# EAGLE board attiny85 (EAGLE 7.5.0)
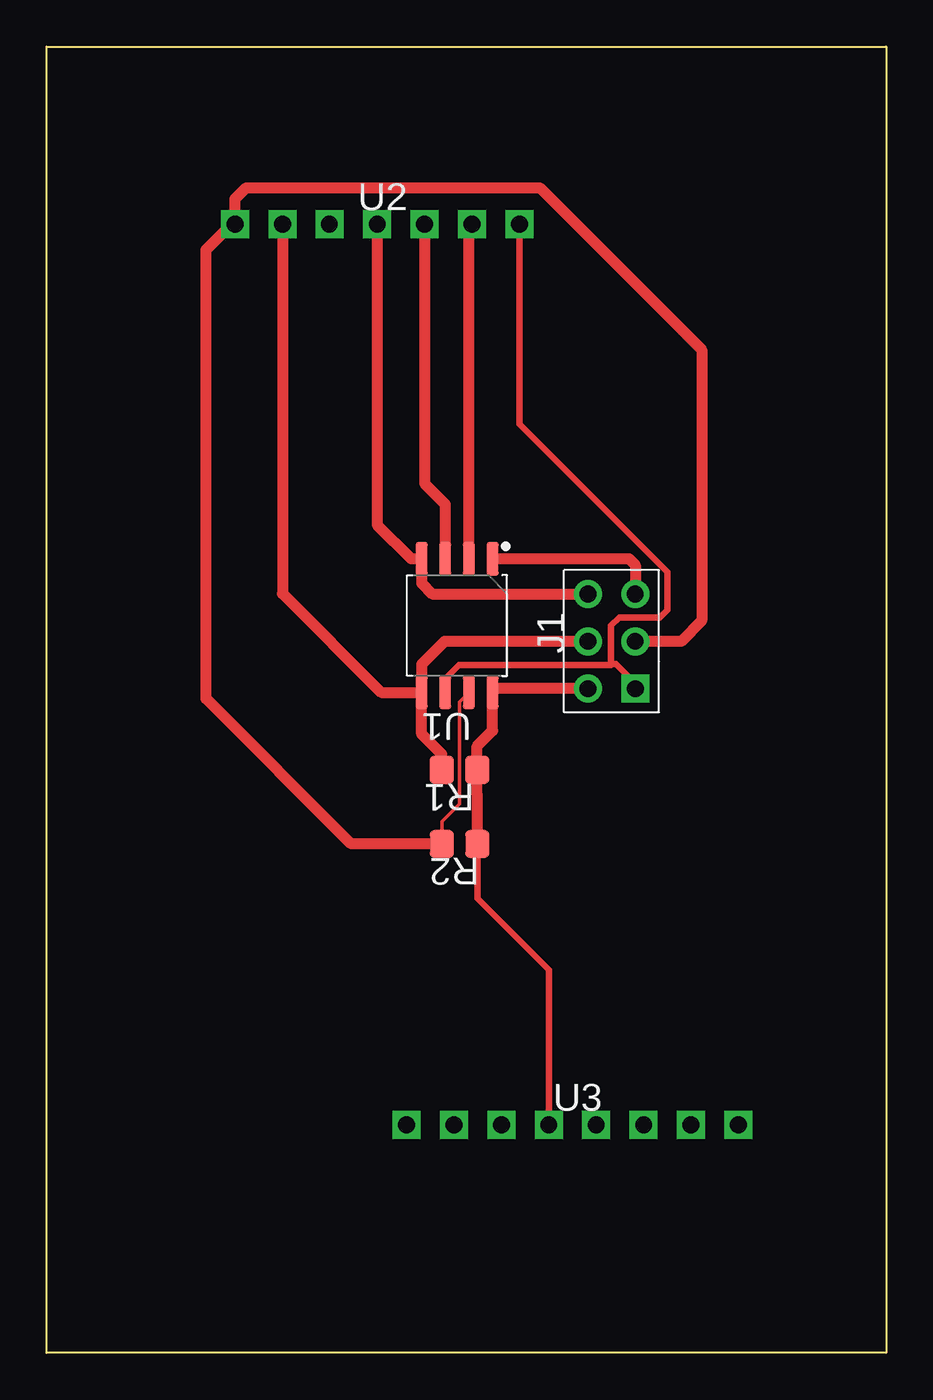
[diagram p0: board, top side]

Size 45 x 70 mm. Coordinates in mm from the lower left corner, seen from the top.
Outline: 0,70 45,70 45,0 0,0 0,70
Copper layers (1*16): Top 0.035mm / dielectric 1.5mm / Bottom 0.035mm
Design rules "default *": minimum track width 10mil, minimum drill 0.61mm, track to track 8mil, track to pad 8mil, pad to pad 8mil, via to via 8mil, smd to smd 8mil, copper to edge 40mil, drill to drill 8mil, minimum pad ring 0mil, minimum via ring 8mil, stop-mask expansion 2mil, vias tented up to drill 19mil, thermal gap 10mil
Net classes: 0 Default: width 0.33 mm, clearance 0.33 mm

## Footprints (pad centres in the part's own frame; a part is rotated, then mirrored left to right if it is on the bottom)
HDR-2x3 = drill 0.9 pad 1.5 square: 1 -2.54,-1.27 | drill 0.9 pad 1.5: 2 -2.54,1.27; 3 0,-1.27; 4 0,1.27; 5 2.54,-1.27; 6 2.54,1.27
RES_0805 = smd 1.3 x 1.5: 1 -0.95,0; 2 0.95,0
SOIC8P127_524X798X216L68X41N = smd 0.64 x 1.81: 1 -1.905,-3.58; 2 -0.635,-3.58; 3 0.635,-3.58; 4 1.905,-3.58; 5 1.905,3.58; 6 0.635,3.58; 7 -0.635,3.58; 8 -1.905,3.58
P4 = drill 0.9 pad 1.5 square: AREF -2.565,0; D11 7.62,0; D12 5.08,0; D13 2.54,0; GND 0,0; SCL -7.62,0; SDA -5.08,0
P5 = drill 0.9 pad 1.5 square: 3.3V -1.27,0; 5V 1.27,0; GND 6.35,0; GND_1 3.81,0; IOREF -6.35,0; N.C. -8.89,0; RESET -3.81,0; VIN 8.89,0

## Placement (x,y rotation side)
J1  HDR-2X3  [HDR-2x3]  30.28,38.13 90 top
R1  RES_0805  [RES_0805]  22.13,31.24 180 top
R2  RES_0805  [RES_0805]  22.14,27.28 180 top
U1  ATTINY85-20SU  [SOIC8P127_524X798X216L68X41N]  22,38.98 180 top
U2  DEV_U2  [P4]  17.72,60.48 0 top
U3  DEV_U3  [P5]  28.19,12.22 0 top

## Library data of the parts
J1 = common; UNIQUE_NAME: HDR-2x3
R1 R2 = common; UNIQUE_NAME: RES_0805
U1 = common; MANUFACTURER: Atmel; PART_NUMBER_(DIGI-KEY): ATTINY85-20SU-ND; UNIQUE_NAME: ATMEL_8S2
U2 U3 = common

## Nets
GND: J1.6 U1.4 U2.GND
M24lrWIP: U1.2 U2.D12
MISO: J1.1 U1.6 U2.D11
MOSI: J1.4 R1.2 U1.5 U2.SDA
PB4: U1.3 U2.D13
RST: J1.5 U1.1
SCK: J1.3 R2.2 U1.7 U2.SCL
VCC: J1.2 R1.1 R2.1 U1.8 U3.3.3V

## Tracks (layer width: path | path; a pad name or v marks a point on that pad's centre or on a via)
GND
  Top 0.6: U2.GND 17.72,44.37 19.53,42.56 U1.4 20.09,41.24 20.66,40.67 J1.6
M24lrWIP
  Top 0.6: U1.2 22.63,60.32 U2.D12
MISO
  Top 0.35: J1.1 31.55,35.87 30.51,36.91 30.25,36.91 | 30.25,36.91 30.25,36.86 22.11,36.86 21.37,36.12 U1.6 | U2.D11 25.34,49.76 33.26,41.84 33.26,39.8 32.88,39.41 30.69,39.41 30.25,38.97 30.25,36.91
MOSI
  Top 0.6: R1.2 21.18,32.08 20.09,33.16 U1.5 | J1.4 21.34,38.13 20.09,36.89 U1.5 | U2.SDA 12.64,40.69 17.94,35.4 U1.5
PB4
  Top 0.6: U2.D13 20.26,46.59 21.37,45.48 U1.3
RST
  Top 0.6: U1.1 31.22,42.56 31.55,42.23 J1.5
SCK
  Top 0.2: R2.2 21.19,28.47 22.13,29.42 22.13,34.89 U1.7
  Top 0.6: R2.2 16.33,27.28 8.54,35.06 8.54,59.11 9.91,60.48 U2.SCL 10.1,61.85 10.69,62.44 26.43,62.44 35.12,53.76 35.12,39.24 34.01,38.13 J1.3
VCC
  Top 0.35: U3.3.3V 26.91,20.53 23.09,24.36 R2.1
  Top 0.6: R2.1 23.09,29.9 23.08,29.9 R1.1 23.08,32.52 23.91,33.35 U1.8 24.1,35.59 J1.2

## Text on the board
tPlace: U2 | J1 | U1 | R1 | R2 | U3